# Altium PCB PCB1.PcbDoc (part 4 of 5)
Units mm, origin at the board's own origin, x right, y up, seen from the top; angles counter-clockwise.
Board outline 200 x 110 mm, 4 copper layers (Top Layer, Power Layer, GND Layer, Bottom Layer), stack 1.714 mm thick; 627 components, 400 nets, 2020 pads, 570 vias.
Unrouted connection lines stored in the file: 110.
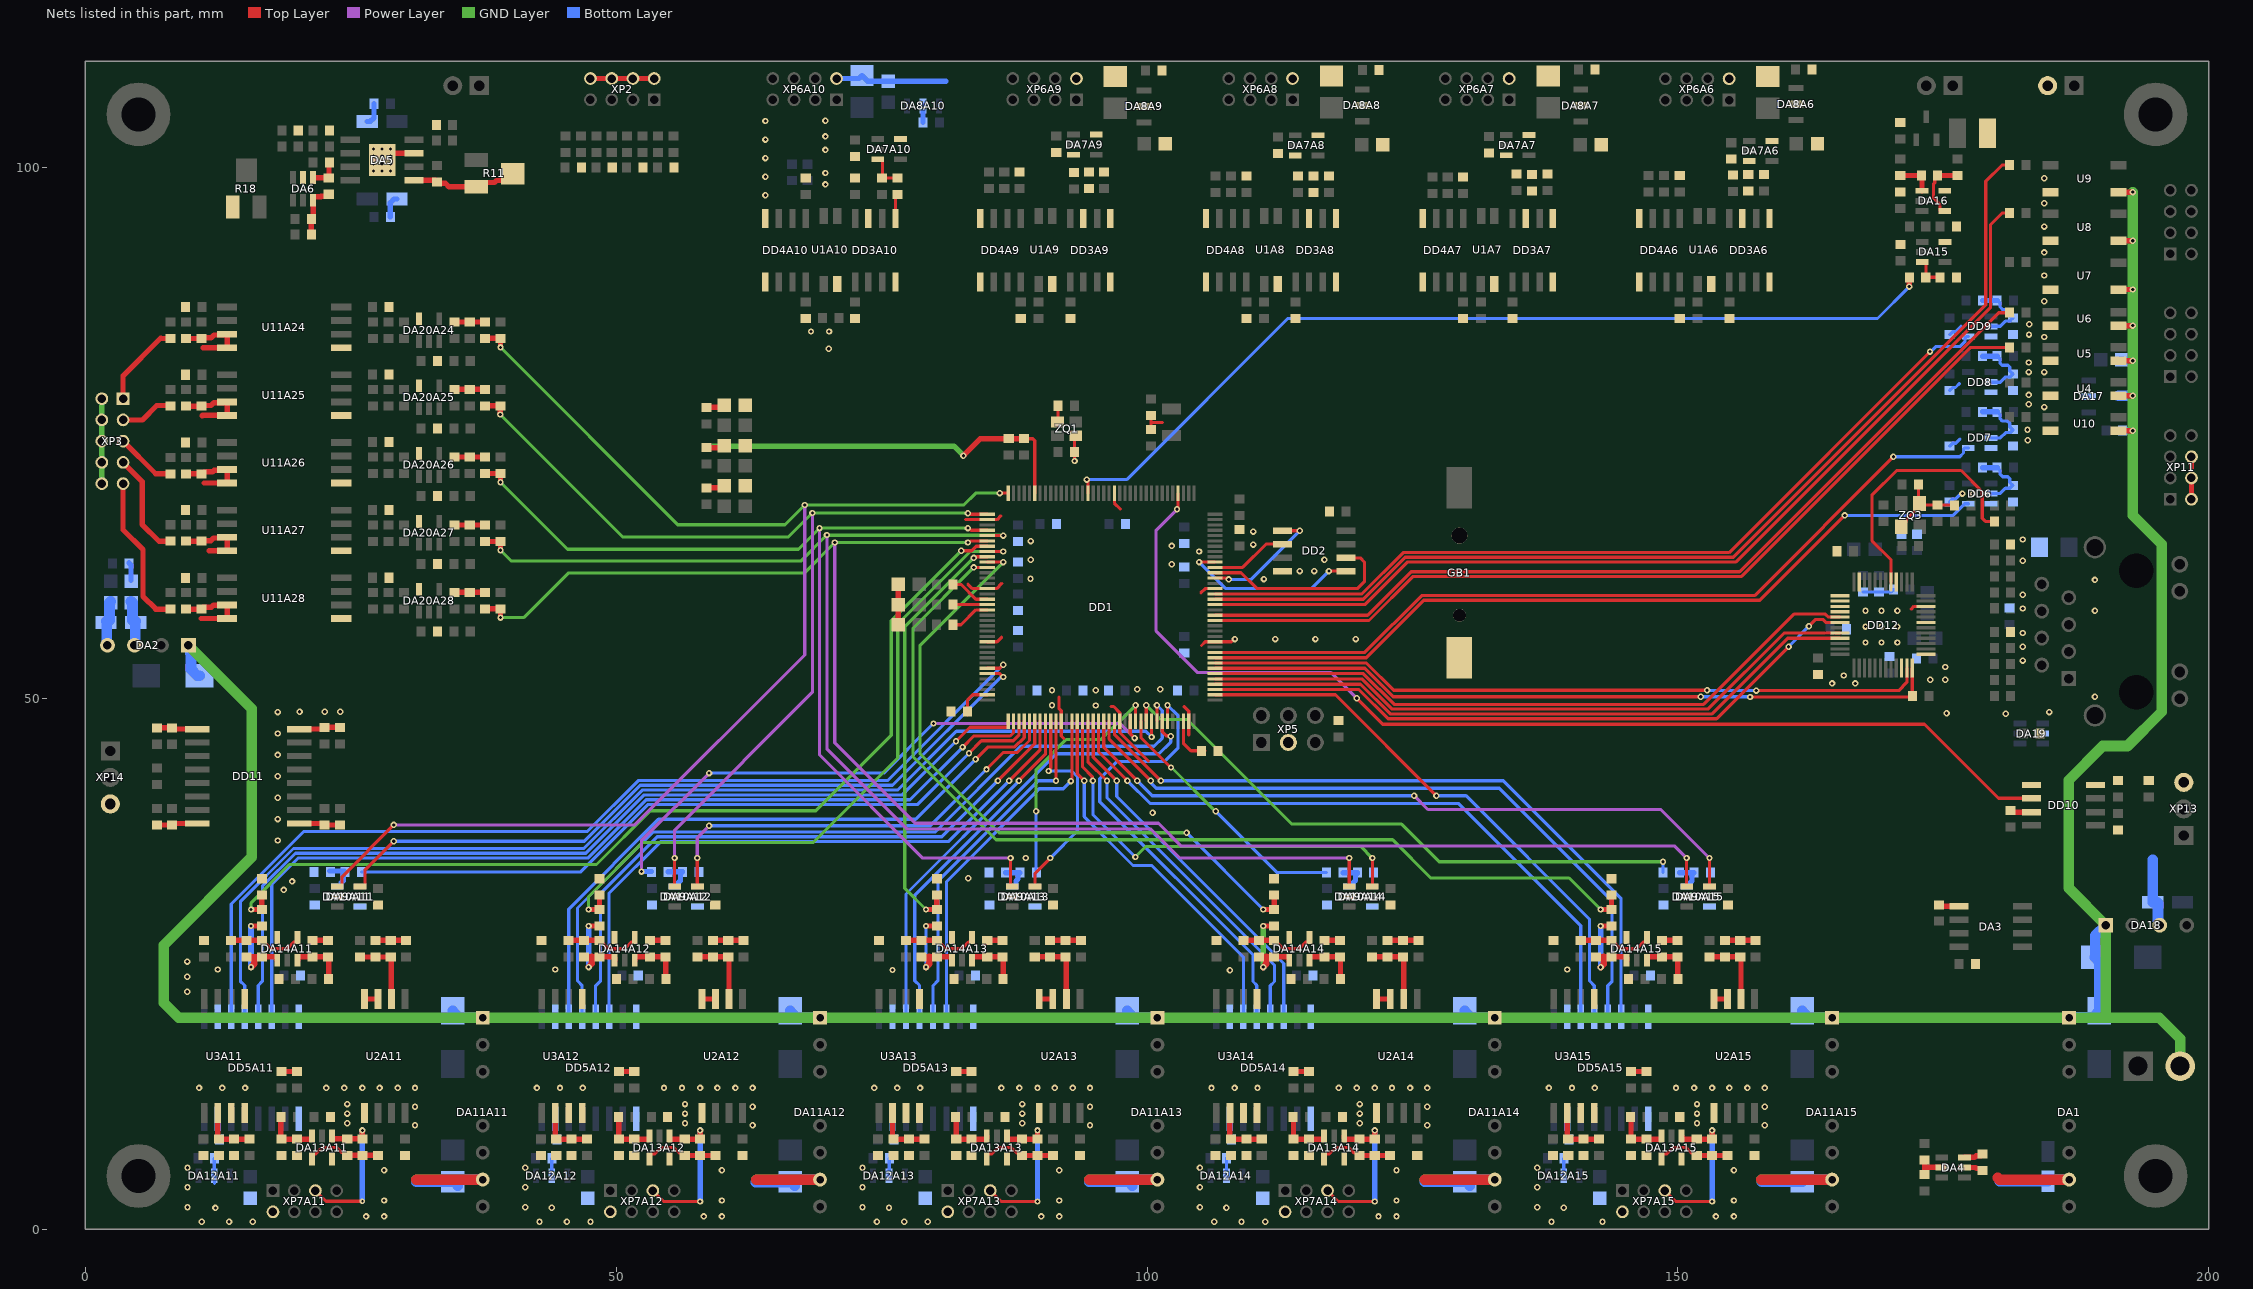
[diagram p5: the nets of this part, all layers, seen from the top]

## Via types
v1: diameter 0.6, hole 0.3, Top Layer to Bottom Layer, tented both sides, 557 vias
v2: diameter 0.6, hole 0.3, Top Layer to Bottom Layer, 12 vias
v3: diameter 0.5, hole 0.2, Top Layer to Bottom Layer, tented both sides, 1 vias

## Nets (pads, with @x,y where several pads share a name; then routed paths per layer and width w, separated by ;. In a path a pad name is that pad's centre, name@x,y a point inside that pad or via, vN(x,y) a via of type N, cw(c..) or ccw(c..) an arc to the next point about the centre after c; other vN are vias at no path point) (continued)
AGND: C5.2 C14.1 C17.1 C18.2 C21.2 C37.1 C38.2 C39.2 C40.2 C41.2 C42.2 C43.2 C44.2 C45A2.2 C45A3.2 C45A4.2 C45A5.2 C58A11.2 C58A12.2 C58A13.2 C58A14.2 C58A15.2 C60A11.2 C60A12.2 C60A13.2 C60A14.2 C60A15.2 C62A11.1 C62A12.1 C62A13.1 C62A14.1 C62A15.1 C67A11.2 C67A12.2 C67A13.2 C67A14.2 C67A15.2 C70A11.2 C70A12.2 C70A13.2 C70A14.2 C70A15.2 C73A11.2 C73A12.2 C73A13.2 C73A14.2 C73A15.2 C76A11.2 C76A12.2 C76A13.2 C76A14.2 C76A15.2 C123A24.2 C123A25.2 C123A26.2 C123A27.2 C123A28.2 C124A24.2 C124A25.2 C124A26.2 C124A27.2 C124A28.2 C125A24.2 C125A25.2 C125A26.2 C125A27.2 C125A28.2 C127A24.2 C127A25.2 C127A26.2 C127A27.2 C127A28.2 DA5.3 DA5.EPAD DA6.2 DA6.6 DA9A11.2 DA9A12.2 DA9A13.2 DA9A14.2 DA9A15.2 DA14A11.5 DA14A12.5 DA14A13.5 DA14A14.5 DA14A15.5 DA20A24.5 DA20A25.5 DA20A26.5 DA20A27.5 DA20A28.5 DD1.31 R1.2 R3.2 R4.2 R13.2 R15.2 R18.1 R28A11.2 R28A12.2 R28A13.2 R28A14.2 R28A15.2 R35A11.2 R35A12.2 R35A13.2 R35A14.2 R35A15.2 R84A24.2 R84A25.2 R84A26.2 R84A27.2 R84A28.2 U2A11.3 U2A11.4 U2A12.3 U2A12.4 U2A13.3 U2A13.4 U2A14.3 U2A14.4 U2A15.3 U2A15.4 U3A11.5 U3A12.5 U3A13.5 U3A14.5 U3A15.5 U11A24.5 U11A25.5 U11A26.5 U11A27.5 U11A28.5 XP2.2 XP2.4 XP2.6 XP2.8 | length 108.1
  Top Layer w0.3: C17.1@88.425,74.45 89.249,74.45 89.425,74.274 DD1.31@89.425,69.3
  Top Layer w0.5: C44.2@21.275,93.675 C43.2@21.275,95.125 21.275,95.175 21.45,95.35 DA6.6@21.45,96.9 21.45,97.225 21.475,97.25 22.175,97.25 22.225,97.3 22.75,97.3 C42.2@22.925,97.475 ; R35A11.2@21.39,27.2 C70A11.2@22.84,27.2 ; U2A11.4@26.29,21.675 U2A11.3@27.565,21.675 ; R28A11.2@27.315,27.2 C60A11.2@30.215,27.2 ; v2(28.75,101.05) 28.75,101.15 28.95,101.35 DA5.3@30.95,101.35 ; R84A28.2@34.75,59.975 C124A28.2@36.2,59.975 C127A28.2@37.65,59.975 ; R84A27.2@34.75,66.325 C124A27.2@36.2,66.325 C127A27.2@37.65,66.325 ; R84A26.2@34.75,72.725 C124A26.2@36.2,72.725 C127A26.2@37.65,72.725 ; R84A25.2@34.75,79.1 C124A25.2@36.2,79.1 C127A25.2@37.65,79.1 ; R84A24.2@34.75,85.45 C124A24.2@36.2,85.45 C127A24.2@37.65,85.45 ; XP2.8@47.575,108.375 XP2.6@49.575,108.375 XP2.4@51.575,108.375 XP2.2@53.575,108.375 ; R35A12.2@53.175,27.2 C70A12.2@54.625,27.2 ; U2A12.4@58.075,21.675 U2A12.3@59.35,21.675 ; C18.2@58.5,69.825 60,69.825 R3.2@60.175,70 ; C5.2@58.5,73.6 59.975,73.6 R1.2@60.175,73.8 ; C21.2@58.5,77.4 59.975,77.4 R4.2@60.175,77.6 ; R28A12.2@59.1,27.2 C60A12.2@62,27.2 ; v1(82.7,72.85) 84.3,74.45 C14.1@86.975,74.45 C17.1@88.425,74.45 ; R35A13.2@84.95,27.2 C70A13.2@86.4,27.2 ; U2A13.4@89.85,21.675 U2A13.3@91.125,21.675 ; R28A13.2@90.875,27.2 C60A13.2@93.775,27.2 ; R35A14.2@116.725,27.2 C70A14.2@118.175,27.2 ; U2A14.4@121.625,21.675 U2A14.3@122.9,21.675 ; R28A14.2@122.65,27.2 C60A14.2@125.55,27.2 ; R35A15.2@148.5,27.2 C70A15.2@149.95,27.2 ; U2A15.4@153.4,21.675 U2A15.3@154.675,21.675 ; R28A15.2@154.425,27.2 C60A15.2@157.325,27.2
  GND Layer w0.5: XP2.8@47.575,108.375 XP2.6@49.575,108.375 XP2.4@51.575,108.375 XP2.2@53.575,108.375 ; 59.115,73.75 81.8,73.75 v1(82.7,72.85)
  Bottom Layer w0.5: C37.1@26.55,104.325 26.825,104.325 27.175,104.675 C38.2@27.175,106 ; C39.2@28.725,95.35 28.725,96.675 29.075,97.025 C40.2@29.35,97.025
  other v2: 27.15,99.65 27.95,99.65 28.75,99.65 27.15,100.35 27.95,100.35 28.75,100.35 27.15,101.05 27.95,101.05 27.15,101.75 27.95,101.75 28.75,101.75
AGND_CS: C6.2 C121A24.2 C121A25.2 C121A26.2 C121A27.2 C121A28.2 C122A24.1 C122A25.1 C122A26.1 C122A27.1 C122A28.1 R2.2 R81A24.2 R81A25.2 R81A26.2 R81A27.2 R81A28.2 U11A24.3 U11A24.4 U11A25.3 U11A25.4 U11A26.3 U11A26.4 U11A27.3 U11A27.4 U11A28.3 U11A28.4 XP3.2 XP3.4 XP3.6 XP3.8 XP3.10 | length 47.2
  Top Layer w0.5: R81A28.2@9.475,58.394 C122A28.1@10.925,58.394 11.1,58.569 11.875,58.569 12.075,58.769 13.325,58.769 U11A28.3@13.35,58.794 U11A28.4@13.35,57.519 10.9,57.519 ; R81A27.2@9.475,64.794 C122A27.1@10.925,64.794 10.98,64.85 11.83,64.85 12.083,65.103 13.283,65.103 U11A27.3@13.35,65.169 U11A27.4@13.35,63.894 11.65,63.894 ; R81A25.2@9.475,77.519 C122A25.1@10.925,77.519 10.98,77.575 11.83,77.575 12.105,77.849 13.28,77.849 U11A25.3@13.35,77.919 U11A25.4@13.35,76.644 11.025,76.644 11,76.619 ; R81A24.2@9.475,83.894 C122A24.1@10.925,83.894 10.98,83.95 11.83,83.95 12.105,84.224 13.28,84.224 U11A24.3@13.35,84.294 U11A24.4@13.35,83.019 11.1,83.019 ; R81A26.2@9.492,71.137 10.992,71.137 10.992,71.161 11.15,71.319 11.44,71.319 11.443,71.322 11.972,71.322 12.124,71.474 13.28,71.474 U11A26.3@13.35,71.544 U11A26.4@13.35,70.269 11.2,70.269
  GND Layer w0.5: XP3.10@1.55,70.219 XP3.8@1.55,72.219 XP3.6@1.55,74.219 XP3.4@1.55,76.219 XP3.2@1.55,78.219
  Bottom Layer w0.5: C6.2@4.1,62.794 4.1,62.744 4.3,62.544 R2.2@4.3,61.119
CRASH_COL: DD1.128 R53.2 | length 98.6
  Top Layer w0.3: DD1.128@106.4,59.325 120.361,59.325 124.311,63.275 155.225,63.275 179,87.05 179,98.7 180.525,100.225 R53.2@181.25,100.225
CRASH_IND: DD1.125 R50.2 | length 86.7
  Top Layer w0.3: DD1.125@106.4,57.825 120.771,57.825 124.871,61.925 155.809,61.925 180.203,86.319 181.219,86.319 R50.2@181.25,86.35
CS1: R80A24.2 XP3.1 | length 8.1
  Top Layer w0.5: XP3.1@3.55,78.219 3.55,80.369 7.1,83.919 ; 7.1,83.894 R80A24.2@8.075,83.894
CS2: R80A25.2 XP3.3 | length 5
  Top Layer w0.5: XP3.3@3.55,76.219 5.375,76.219 6.725,77.569 R80A25.2@8.025,77.569
CS3: R80A26.2 XP3.5 | length 5.7
  Top Layer w0.5: XP3.5@3.55,74.219 6.625,71.144 R80A26.2@8.025,71.144
CS4: R80A27.2 XP3.7 | length 9.8
  Top Layer w0.5: XP3.7@3.55,72.219 5.35,70.419 5.35,66.369 6.925,64.794 R80A27.2@7.95,64.794
CS5: R80A28.2 XP3.9 | length 14.3
  Top Layer w0.5: XP3.9@3.55,70.219 3.55,65.869 5.425,63.994 5.425,59.605 6.636,58.394 R80A28.2@7.85,58.394
DRV1_ADC: C76A11.1 DD1.43 R40A11.2 | length 92.6
  Top Layer w0.3: v1(82.5,63.9) 83.469,63.9 83.894,64.325 DD1.43@84.95,64.325
  Top Layer w0.5: v1(15.605,30.1) R40A11.2@16.625,30.1 C76A11.1@16.625,31.45
  GND Layer w0.3: v1(15.605,30.1) 15.605,30.73 19.219,34.344 48.144,34.344 53.2,39.4 68.8,39.4 75.9,46.5 75.9,57.3 v1(82.5,63.9)
DRV1_AN_MOD: DD1.75 R25A11.1 | length 68.6
  Top Layer w0.3: v1(83.225,44.825) 84.4,46 87.4,46 87.925,46.525 DD1.75@87.925,47.85
  Bottom Layer w0.3: R25A11.1@26,33.65 46.657,33.65 53.007,40 78.4,40 v1(83.225,44.825)
DRV1_DIG_MOD: DD1.100 DD5A11.4 | length 105.2
  Top Layer w0.3: v1(100.425,46.35) DD1.100@100.425,47.85
  Bottom Layer w0.3: DD5A11.4@15.005,20 15.005,22.945 14.6,23.35 14.6,30.848 19.602,35.85 46.948,35.85 52.448,41.35 76.492,41.35 82.043,46.902 99.873,46.902 v1(100.425,46.35)
DRV1_ERR1: DD1.73 DD5A11.5 | length 89.5
  Top Layer w0.3: v1(82,45.95) 83.325,47.275 86.925,47.275 DD1.73@86.925,47.85
  Bottom Layer w0.3: DD5A11.5@16.275,20 16.275,22.95 16.675,23.35 16.675,32.286 19.789,35.4 47.134,35.4 52.634,40.9 76.95,40.9 v1(82,45.95)
DRV1_ERR2: DD1.74 DD5A11.6 | length 89.4
  Top Layer w0.3: v1(82.625,45.4) 83.675,46.45 87.1,46.45 87.425,46.775 DD1.74@87.425,47.85
  Bottom Layer w0.3: DD5A11.6@17.545,20 17.545,32.47 20.025,34.95 47.321,34.95 52.821,40.45 77.675,40.45 v1(82.625,45.4)
DRV1_ON: DD1.66 DD5A11.3 | length 94.3
  Top Layer w0.3: DD1.66@84.95,52.825 86.125,52.825 v1(86.45,53.15)
  Bottom Layer w0.3: DD5A11.3@13.735,20 13.735,30.619 20.566,37.45 47.275,37.45 52.075,42.25 75.55,42.25 v1(86.45,53.15)
DRV1_SEL_AN: DA9A11.6 DD1.67 | length 71.2
  Top Layer w0.3: DA9A11.6@25.875,32.275 26.2,32.275 26.325,32.4 26.325,33.8 v1(29.05,36.525) ; DD1.67@84.95,52.325 86.125,52.325 v1(86.45,52)
  Bottom Layer w0.3: v1(29.05,36.525) 46.986,36.525 52.261,41.8 76.025,41.8 86.168,51.943 86.393,51.943 v1(86.45,52)
DRV2_ADC: C76A12.1 DD1.44 R40A12.2 | length 65
  Top Layer w0.3: DD1.44@84.95,63.825 v1(86.45,63.825)
  Top Layer w0.5: v1(47.4,30.1) R40A12.2@48.425,30.1 C76A12.1@48.425,31.45
  GND Layer w0.3: v1(47.4,30.1) 47.4,31.325 52.5,36.425 68.577,36.425 76.525,44.373 76.525,57 83.35,63.825 v1(86.45,63.825)
DRV2_AN_MOD: DD1.96 R25A12.1 | length 57.2
  Top Layer w0.3: DD1.96@98.425,47.85 98.425,46.675 98.825,46.275 v1(98.825,46.25)
  Power Layer w0.3: v1(52.375,33.675) 52.375,36.575 v1(58.75,42.95) ; v1(79.881,47.63) 97.445,47.63 v1(98.825,46.25)
  Bottom Layer w0.3: R25A12.1@53.3,33.675 R25A12.1@53.325,33.65 ; v1(58.75,42.95) 75.202,42.95 v1(79.881,47.63)
  Bottom Layer w0.5: v1(52.375,33.675) R25A12.1@53.3,33.675
DRV2_DIG_MOD: DD1.101 DD5A12.4 | length 76.9
  Top Layer w0.3: DD1.101@100.925,47.85 100.925,48.6 v1(100.925,49.35)
  Bottom Layer w0.3: DD5A12.4@46.79,20 46.79,22.935 46.35,23.375 46.35,30.25 53.5,37.4 80.043,37.4 88.118,45.475 100.65,45.475 101.425,46.25 101.425,48.85 v1(100.925,49.35)
DRV2_ERR1: DD1.78 DD5A12.5 | length 60.7
  Top Layer w0.3: v1(85.95,42.225) 89.425,45.7 DD1.78@89.425,47.85
  Bottom Layer w0.3: DD5A12.5@48.06,20 48.06,22.935 48.525,23.4 48.525,31.625 53.85,36.95 80.675,36.95 v1(85.95,42.225)
DRV2_ERR2: DD1.79 DD5A12.6 | length 60.5
  Top Layer w0.3: v1(87.006,42.225) 89.925,45.144 DD1.79@89.925,47.85
  Bottom Layer w0.3: DD5A12.6@49.33,20 49.33,31.655 54.175,36.5 81.281,36.5 v1(87.006,42.225)
DRV2_ON: DD1.76 DD5A12.3 | length 61.3
  Top Layer w0.3: v1(83.85,44.25) 85.025,45.425 87.554,45.425 88.425,46.296 DD1.76@88.425,47.85
  Bottom Layer w0.3: DD5A12.3@45.52,20 45.52,30.145 53.975,38.6 78.2,38.6 v1(83.85,44.25)
DRV2_SEL_AN: DA9A12.6 DD1.77 | length 41.5
  Top Layer w0.3: v1(57.625,34.95) 57.625,32.3 DA9A12.6@57.65,32.275 ; v1(84.875,43.3) 86.475,44.9 87.8,44.9 88.925,46.025 DD1.77@88.925,47.85
  Power Layer w0.3: v1(57.625,34.95) 57.625,36.875 v1(58.75,38)
  Bottom Layer w0.3: v1(58.75,38) 79.575,38 v1(84.875,43.3)
DRV3_ADC: C76A13.1 DD1.45 R40A13.2 | length 40.3
  Top Layer w0.3: v1(83.675,63.225) 83.756,63.225 83.856,63.325 DD1.45@84.95,63.325
  Top Layer w0.5: v1(79.175,30.1) R40A13.2@80.2,30.1 C76A13.1@80.2,31.45
  GND Layer w0.3: v1(79.175,30.1) 77.175,32.1 77.175,56.725 v1(83.675,63.225)
DRV3_AN_MOD: DD1.97 R25A13.1 | length 23.1
  Top Layer w0.3: DD1.97@98.925,47.85 v1(98.925,49.35)
  GND Layer w0.3: v1(89.55,39.35) 89.55,43.275 92.4,46.125 95.7,46.125 v1(98.925,49.35)
  Bottom Layer w0.3: v1(89.55,39.35) 89.55,33.6 R25A13.1@89.575,33.575
DRV3_DIG_MOD: DD1.102 DD5A13.4 | length 44.2
  Top Layer w0.3: DD1.102@101.425,47.85 101.425,46.865 101.814,46.475 102.175,46.475 v1(102.225,46.425)
  Bottom Layer w0.3: DD5A13.4@78.565,20 78.565,22.96 78.125,23.4 78.125,31.451 91.449,44.775 101.125,44.775 102.225,45.875 v1(102.225,46.425)
DRV3_ERR1: DD1.82 DD5A13.5 | length 33.6
  Top Layer w0.3: v1(91.425,42.225) DD1.82@91.425,47.85
  Bottom Layer w0.3: DD5A13.5@79.835,20 79.835,22.935 80.3,23.4 80.3,32.775 89.75,42.225 v1(91.425,42.225)
DRV3_ERR2: DD1.85 DD5A13.6 | length 34.1
  Top Layer w0.3: v1(92.825,42.2) 92.825,42.281 92.925,42.381 DD1.85@92.925,47.85
  Bottom Layer w0.3: DD5A13.6@81.105,20 81.105,32.73 89.85,41.475 92.1,41.475 v1(92.825,42.2)
DRV3_ON: DD1.80 DD5A13.3 | length 33.3
  Top Layer w0.3: v1(87.925,42.225) 90.425,44.725 DD1.80@90.425,47.85
  Bottom Layer w0.3: DD5A13.3@77.295,20 77.295,31.56 87.925,42.19 v1(87.925,42.225)
DRV3_SEL_AN: DA9A13.6 DD1.81 | length 19.7
  Top Layer w0.3: DA9A13.6@89.45,32.275 89.45,33.525 v1(90.875,34.95) ; v1(90.725,43.15) 90.725,43.231 90.925,43.431 DD1.81@90.925,47.85
  Bottom Layer w0.3: v1(90.725,43.15) 92.9,43.15 93.45,42.6 93.45,37.525 v1(90.875,34.95)
DRV4_ADC: C76A14.1 DD1.46 R40A14.2 | length 63.6
  Top Layer w0.3: DD1.46@84.95,62.825 v1(86.45,62.825)
  Top Layer w0.5: v1(110.95,30.1) R40A14.2@111.975,30.1 C76A14.1@111.975,31.45
  GND Layer w0.3: v1(86.45,62.825) 78.625,55 78.625,44.75 86.05,37.325 v1(103.725,37.325)
  Bottom Layer w0.3: v1(103.725,37.325) v1(110.95,30.1)
DRV4_AN_MOD: DD1.98 R25A14.1 | length 24.3
  Top Layer w0.3: DD1.98@99.425,47.85 99.425,46.275 102.225,43.475 v1(102.25,43.475)
  GND Layer w0.3: v1(102.25,43.475) 102.3,43.475 106.425,39.35 v1(106.475,39.35)
  Bottom Layer w0.3: v1(106.475,39.35) 112.25,33.575 R25A14.1@116.9,33.575
DRV4_DIG_MOD: DD1.103 DD5A14.4 | length 43.1
  Top Layer w0.3: DD1.103@101.925,47.85 101.925,48.6 v1(101.925,49.35)
  Bottom Layer w0.3: v1(101.925,49.35) 102.925,48.35 102.925,45.325 101.65,44.05 97.175,44.05 95.55,42.425 95.55,40.25 109.975,25.825 109.975,23.325 110.34,22.96 DD5A14.4@110.34,20
DRV4_ERR1: DD1.88 DD5A14.5 | length 35.3
  Top Layer w0.3: DD1.88@94.425,47.85 94.425,44.025 v1(96.225,42.225)
  Bottom Layer w0.3: v1(96.225,42.225) 96.225,40.625 112,24.85 112,23.325 111.61,22.935 DD5A14.5@111.61,20
DRV4_ERR2: DD1.89 DD5A14.6 | length 35.3
  Top Layer w0.3: DD1.89@94.925,47.85 94.925,44.45 v1(97.15,42.225)
  Bottom Layer w0.3: v1(97.15,42.225) 97.15,40.75 112.88,25.02 DD5A14.6@112.88,20
DRV4_ON: DD1.86 DD5A14.3 | length 35.4
  Top Layer w0.3: DD1.86@93.425,47.85 93.425,42.875 v1(94.075,42.225)
  Bottom Layer w0.3: v1(94.075,42.225) 94.075,38.85 98.675,34.25 100.45,34.25 109.07,25.63 DD5A14.3@109.07,20
DRV4_SEL_AN: DA9A14.6 DD1.87 | length 40.7
  Top Layer w0.3: DD1.87@93.925,47.85 93.925,43.525 94.843,42.607 94.843,42.282 v1(94.9,42.225) ; DA9A14.6@121.2,32.275 121.225,32.3 v1(121.225,34.95)
  GND Layer w0.3: v1(98.9,35.05) 99.9,36.05 120.125,36.05 v1(121.225,34.95)
  Bottom Layer w0.3: v1(94.9,42.225) 94.9,39.05 v1(98.9,35.05)
DRV5_ADC: C76A15.1 DD1.47 R40A15.2 | length 94.6
  Top Layer w0.3: v1(83.675,62.325) 84.375,62.325 DD1.47@84.95,62.325
  Top Layer w0.5: v1(142.725,30.1) R40A15.2@143.75,30.1 C76A15.1@143.75,31.45
  GND Layer w0.3: v1(83.675,62.325) 77.95,56.6 77.95,44.5 85.775,36.675 123.125,36.675 126.725,33.075 139.75,33.075 v1(142.725,30.1)
DRV5_AN_MOD: DD1.99 R25A15.1 | length 57.3
  Top Layer w0.3: DD1.99@99.925,47.85 v1(99.925,49.35)
  GND Layer w0.3: v1(99.925,49.35) 101.275,48 103.8,48 113.65,38.15 123.975,38.15 127.525,34.6 v1(148.6,34.6)
  Bottom Layer w0.3: R25A15.1@148.6,33.575 v1(148.6,34.6)
DRV5_DIG_MOD: DD1.110 DD5A15.4 | length 53.4
  Top Layer w0.3: DD1.110@106.4,50.325 117.75,50.325 v1(127.25,40.825)
  Bottom Layer w0.3: v1(127.25,40.825) 130.05,40.825 141.675,29.2 141.675,23.375 142.115,22.935 DD5A15.4@142.115,20
DRV5_ERR1: DD1.92 DD5A15.5 | length 66.4
  Top Layer w0.3: DD1.92@96.425,47.85 96.425,46.15 v1(100.35,42.225)
  Bottom Layer w0.3: v1@100.35,42.026 100.851,41.525 133.175,41.525 143.8,30.9 143.8,23.35 143.385,22.935 DD5A15.5@143.385,20
DRV5_ERR2: DD1.93 DD5A15.6 | length 66.5
  Top Layer w0.3: DD1.93@96.925,47.85 96.925,46.6 v1(101.3,42.225)
  Bottom Layer w0.3: v1(101.3,42.225) 133.55,42.225 144.655,31.12 DD5A15.6@144.655,20
DRV5_ON: DD1.90 DD5A15.3 | length 63.5
  Top Layer w0.3: DD1.90@95.425,47.85 95.425,44.975 v1@98.065,42.335
  Bottom Layer w0.3: v1(98.15,42.225) 100.275,40.1 129.325,40.1 140.845,28.58 DD5A15.3@140.845,20
DRV5_SEL_AN: DA9A15.6 DD1.91 | length 66.5
  Top Layer w0.3: DD1.91@95.925,47.85 95.925,45.375 v1(99.075,42.225) ; DA9A15.6@152.975,32.275 v1(152.975,34.95)
  Power Layer w0.3: v1(125.15,40.825) 126.45,39.525 148.4,39.525 v1(152.975,34.95)
  Bottom Layer w0.3: v1(99.075,42.225) 100.475,40.825 v1(125.15,40.825)
EMER_BUT: DD1.117 DD6.4 | length 77
  Top Layer w0.3: DD1.117@106.4,53.825 120.65,53.825 126.05,59.225 157.725,59.225 v1(165.725,67.225)
  Bottom Layer w0.3: v1(165.725,67.225) 175.925,67.225 177.025,68.325 DD6.4@177.35,68.325
EMIS_COL: DD1.127 R52.2 | length 94.7
  Top Layer w0.3: DD1.127@106.4,58.825 120.498,58.825 124.498,62.825 155.436,62.825 179.45,86.839 179.45,94.625 180.525,95.7 R52.2@181.25,95.7
EMIS_IND: DD1.124 R49.2 | length 85.5
  Top Layer w0.3: DD1.124@106.4,57.325 120.907,57.325 125.057,61.475 156,61.475 177.575,83.05 R49.2@181.25,83.05
ETH_CS: DD1.114 DD12.29 | length 63.7
  Top Layer w0.3: DD1.114@106.4,52.325 120.375,52.325 123.275,49.425 152.425,49.425 160.925,57.925 163.875,57.925 164.15,57.65 DD12.29@165.275,57.65
ETH_INT: DD1.116 DD12.47 | length 67.9
  Top Layer w0.3: DD1.116@106.4,53.325 120.65,53.325 123.225,50.75 v1(152.75,50.75) ; v1(157.375,50.725) 170.799,50.725 171.575,51.5 DD12.47@171.575,52.85
  Bottom Layer w0.3: v1(152.75,50.75) 152.763,50.738 157.362,50.738 v1(157.375,50.725)
ETH_MISO: DD1.112 DD12.33 | length 63
  Top Layer w0.3: DD1.112@106.4,51.325 120.1,51.325 122.9,48.525 153.225,48.525 160.35,55.65 DD12.33@165.275,55.65
ETH_MOSI: DD1.113 DD12.32 | length 63
  Top Layer w0.3: DD1.113@106.4,51.825 120.236,51.825 123.086,48.975 152.825,48.975 160.001,56.15 DD12.32@165.275,56.15
ETH_RST: DD1.115 DD12.48 R79.1 | length 69.5
  Top Layer w0.3: DD1.115@106.4,52.825 120.514,52.825 123.189,50.15 v1(152.15,50.15) ; v1(156.8,50.125) 172.024,50.125 R79.1@172.1,50.2 172.075,50.226 DD12.48@172.075,52.85
  Bottom Layer w0.3: v1(152.15,50.15) 152.162,50.137 156.787,50.137 v1(156.8,50.125)
ETH_SCLK: DD1.111 DD12.30 | length 64
  Top Layer w0.3: DD1.111@106.4,50.825 119.95,50.825 122.7,48.075 153.65,48.075 v1(160.425,54.85) ; v1(162.339,56.789) 162.975,57.425 163.65,57.425 163.925,57.15 DD12.30@165.275,57.15
  Bottom Layer w0.3: v1(160.425,54.85) 160.425,54.875 v1(162.339,56.789)
EXT1_AN_MOD: C127A24.1 DA9A11.1 DD1.36 R86A24.2 | length 125.9
  Top Layer w0.3: DA9A11.1@23.725,32.275 24.05,32.275 24.175,32.4 24.175,33.2 v1(29.05,38.075) ; v1(86.125,69.325) 86.925,69.325 DD1.36@86.925,69.3
  Top Layer w0.5: C127A24.1@37.65,83.9 R86A24.2@39.1,83.9 v1(39.1,83.05)
  Power Layer w0.3: v1(29.05,38.075) 51.75,38.075 67.75,54.075 v1(67.75,68.2)
  GND Layer w0.3: v1(39.1,83.05) 55.8,66.35 65.9,66.35 v1(67.75,68.2) 82.725,68.2 83.85,69.325 v1(86.125,69.325)
EXT2_AN_MOD: C127A25.1 DA9A12.1 DD1.37 R86A25.2 | length 94.5
  Top Layer w0.3: DA9A12.1@55.5,32.275 v1(55.5,34.95) ; v1(83.125,67.425) 83.206,67.425 83.306,67.325 DD1.37@84.95,67.325
  Top Layer w0.5: C127A25.1@37.65,77.55 R86A25.2@39.1,77.55 39.088,77.538 39.088,76.738 v1(39.075,76.725)
  Power Layer w0.3: v1(55.5,34.95) 55.5,37.575 68.475,50.55 v1(68.475,67.45)
  GND Layer w0.3: v1(39.075,76.725) 50.614,65.186 66.211,65.186 v1(68.475,67.45) 68.487,67.438 83.113,67.438 v1(83.125,67.425)
EXT3_AN_MOD: C127A26.1 DA9A13.1 DD1.40 R86A26.2 | length 97.8
  Top Layer w0.3: v1(83.125,66.025) 83.206,66.025 83.406,65.825 DD1.40@84.95,65.825 ; v1(87.15,34.95) 87.15,32.4 87.275,32.275 DA9A13.1@87.3,32.275
  Top Layer w0.5: C127A26.1@37.65,71.175 R86A26.2@39.1,71.175 v1(39.1,70.35)
  Power Layer w0.3: v1(69.15,66.025) 69.15,44.675 78.875,34.95 v1(87.15,34.95)
  GND Layer w0.3: v1(39.1,70.35) 45.408,64.042 67.167,64.042 v1(69.15,66.025) v1(83.125,66.025)
EXT4_AN_MOD: C127A27.1 DA9A14.1 DD1.41 R86A27.2 | length 128.9
  Top Layer w0.3: DD1.41@84.95,65.325 v1(86.45,65.325) ; DA9A14.1@119.05,32.275 v1(119.05,34.95)
  Top Layer w0.5: C127A27.1@37.65,64.775 R86A27.2@39.1,64.775 v1(39.1,63.95)
  Power Layer w0.3: v1(69.843,65.382) 69.843,45.232 77.4,37.675 100.375,37.675 103.1,34.95 v1(119.05,34.95)
  GND Layer w0.3: v1(39.1,63.95) 40.132,62.918 67.378,62.918 v1(69.843,65.382) 69.875,65.35 86.425,65.35 v1(86.45,65.325)
EXT5_AN_MOD: C127A28.1 DA9A15.1 DD1.42 R86A28.2 | length 157.4
  Top Layer w0.3: v1(83.125,64.675) 83.206,64.675 83.356,64.825 DD1.42@84.95,64.825 ; DA9A15.1@150.825,32.275 v1(150.825,34.95)
  Top Layer w0.5: C127A28.1@37.65,58.425 R86A28.2@39.1,58.425 v1(39.1,57.6)
  Power Layer w0.3: v1(70.575,64.675) 70.575,45.8 78.15,38.225 101.075,38.225 103.225,36.075 149.7,36.075 v1(150.825,34.95)
  GND Layer w0.3: v1(39.1,57.6) 41.275,57.6 45.469,61.794 67.694,61.794 v1(70.575,64.675) v1(83.125,64.675)
FIBER_IL: DD1.129 DD9.4 | length 81.2
  Top Layer w0.3: DD1.129@106.4,59.825 120.225,59.825 124.125,63.725 154.826,63.725 v1(173.751,82.649)
  Bottom Layer w0.3: v1(173.751,82.649) 173.799,82.649 174.275,83.125 176.55,83.125 177.05,83.625 177.05,83.95 177.175,84.075 DD9.4@177.35,84.075
FLOW: DD1.4 DD10.6 | length 102.8
  Top Layer w0.3: v1(102.825,67.8) 102.825,67.881 102.925,67.981 DD1.4@102.925,69.3 ; v1(119.75,50) 122.2,47.55 173.225,47.55 180.2,40.575 DD10.6@183.325,40.575
  Power Layer w0.3: v1(102.825,67.8) 100.85,65.825 100.85,56.325 104.762,52.413 117.337,52.413 v1(119.75,50)
GND: C3.2 C7.1 C8.2 C10.2 C11.2 C12.2 C13.2 C15.2 C16.1 C19.2 C20.2 C22.2 C23.1 C24.2 C25.2 C26.2 C27.2 C28.1 C29.1 C30.1 C31.2 C32.2 C33.1 C34.2 C35.2 C46A6.2 C46A7.2 C46A8.2 C46A9.2 C46A10.2 C47A6.2 C47A7.2 C47A8.2 C47A9.2 C47A10.2 C55A11.2 C55A12.2 C55A13.2 C55A14.2 C55A15.2 C56A11.2 C56A12.2 C56A13.2 C56A14.2 C56A15.2 C64A11.2 C64A12.2 C64A13.2 C64A14.2 C64A15.2 C77.2 C78.2 C79.2 C83.2 C84.2 C85.2 C86.2 C87.2 C88.2 C89.2 C90.2 C95.2 C96.2 C97.2 C98.2 C99.1 C104.2 C105.2 C106.2 C107.2 C108.2 C109.2 C110.2 C111.2 C112.2 C113.2 C114.2 C115.2 C116.2 C117.2 C118.2 C119.2 C120.2 DA1.7 DA3.1 DA4.2 DA10A11.5 DA10A12.5 DA10A13.5 DA10A14.5 DA10A15.5 DA15.5 DA16.5 DA19.2 DD1.16 DD1.38 DD1.51 DD1.61 DD1.83 DD1.94 DD1.107 DD1.120 DD1.130 DD2.4 DD3A6.4 DD3A7.4 DD3A8.4 DD3A9.4 DD3A10.4 DD4A6.5 DD4A7.5 DD4A8.5 DD4A9.5 DD4A10.5 DD5A11.2 DD5A11.8 DD5A12.2 DD5A12.8 DD5A13.2 DD5A13.8 DD5A14.2 DD5A14.8 DD5A15.2 DD5A15.8 DD6.3 DD7.3 DD8.3 DD9.3 DD10.5 DD10.7 DD11.1 DD11.8 DD12.1 DD12.7 DD12.10 DD12.16 DD12.23 DD12.25 DD12.26 DD12.27 DD12.28 DD12.46 GB1.1 R1.1 R3.1 R4.1 R5.2 R9.2 R43.2 R46.1 R47.1 R75.1 U1A6.2 U1A7.2 U1A8.2 U1A9.2 U1A10.2 U4.2 U5.2 U6.2 U7.3 U8.3 U9.3 U10.2 VD1.2 VD2.2 VD3.2 XP5.3 XP11.2 XP11.4 XP11.6 XP12.2 ZQ1.2 ZQ1.4 ZQ3.2 ZQ3.4 | length 88.7
  Top Layer w0.3: 82.925,66.825 DD1.38@84.95,66.825 85.875,66.825 86.225,67.175 ; 83.125,60.75 83.55,60.325 DD1.51@84.95,60.325 85.825,60.325 86.325,60.825 ; DD1.61@84.95,55.325 85.875,55.325 86.3,55.75 ; ZQ1.4@91.575,76.025 91.625,76.075 C19.2@91.625,77.55 ; 91.7,50.1 91.7,49.051 91.925,48.826 DD1.83@91.925,47.85 91.925,46.45 92.175,46.2 ; v1(93.175,72.35) C12.2@93.175,73.2 93.175,74.625 ZQ1.2@93.275,74.725 ; 96.6,49.225 96.849,49.225 97.425,48.649 DD1.94@97.425,47.85 97.425,46.775 100.112,44.087 ; DD1.16@96.925,69.3 96.925,68.384 97.477,67.832 ; C20.2@100.375,75.325 100.375,75.988 ; C13.2@100.375,76.65 100.375,75.988 ; 101.426,75.988 100.375,75.988 ; 103.5,49.2 103.925,48.775 DD1.107@103.925,47.85 103.925,46.55 ; 105.075,59.925 105.475,60.325 DD1.130@106.4,60.325 ; 105.125,54.975 105.475,55.325 107.949,55.325 108.199,55.575 v1(108.275,55.575) ; ZQ3.4@171.05,66.15 171.5,66.6 171.5,66.825 172.3,67.625 172.3,67.9 172.6,68.2 176.012,68.2 R75.1@176.05,68.162 ; 171.975,58.4 172.226,58.65 DD12.10@173.375,58.65 ; C112.2@172.675,70.15 172.675,68.425 ZQ3.2@172.75,68.35 ; C11.2@174.6,30.575 C11.2@174.775,30.4
  Top Layer w0.5: DD11.1@20.15,38.209 22.385,38.209 C99.1@22.525,38.069 C96.2@23.975,38.069 ; DD11.8@20.15,47.099 22.355,47.099 22.525,47.269 C97.2@23.975,47.269 ; VD3.2@76.55,56.925 VD2.2@76.55,58.825 VD1.2@76.55,60.725 ; C8.2@173.225,5.075 173.225,5.825 ; C15.2@173.225,6.425 173.225,5.825 ; C11.2@174.775,30.4 DA3.1@176.475,30.4 ; DA4.2@174.825,5.825 174.304,5.825 173.225,5.825 ; C95.2@181.325,39.425 181.475,39.275 DD10.7@183.325,39.275 ; XP11.2@198.375,68.75 XP11.4@198.375,70.75 XP11.6@198.375,72.75
  Top Layer w1: 180.125,4.825 180.285,4.665 DA1.7@186.85,4.665
  Bottom Layer w0.3: C120.2@167.425,60.01 C119.2@168.925,60.01 170.085,60.01 C109.2@170.325,60.25 ; C86.2@175.6,68.5 175.875,68.775 176.18,68.775 v1@176.604,69.199 ; C87.2@175.6,73.75 175.875,74.025 176.171,74.025 176.562,74.415 ; C88.2@175.6,79 175.875,79.275 176.15,79.275 176.535,79.66 ; C90.2@175.6,84.25 175.875,84.525 176.15,84.525 176.676,85.051
  Bottom Layer w0.5: C3.2@184.85,4.45 C3.2@185.065,4.665
  Bottom Layer w1: 180.325,4.5 C3.2@184.85,4.5 ; C3.2@185.065,4.665 DA1.7@186.85,4.665
  other v1: 9.6,22.35 9.6,23.775 107.8,24.375 76.025,24.4 12.475,24.45 44.25,24.45 139.575,24.45 9.6,25.2 18.675,31.95 19.475,32.75 83.15,33.05 88.575,34.95 18.125,36.6 18.125,38.617 100.525,39.225 18.125,40.633 18.125,42.65 18.125,44.667 18.125,46.683 180.875,48.551 175.307,48.583 18.125,48.7 184.975,48.7 20.175,48.725 22.55,48.725 24,48.725 95.175,49.325 91.05,49.35 189.275,50.151 91.05,50.75 95.175,50.75 99.075,50.85 101.25,50.85 164.525,51.4 166.7,51.4 173.775,51.751 175.175,51.751 165.625,52.15 175.175,52.951 182.475,53.551 182.475,54.851 167.675,55.25 169.175,55.25 170.675,55.25 112.067,55.575 115.858,55.575 119.65,55.575 182.475,56.151 167.675,56.75 169.175,56.75 170.675,56.75 167.675,58.25 169.175,58.25 170.675,58.25 189.275,58.251 182.475,58.451 182.475,59.751 189.275,61.151 111,61.225 89.025,61.25 114.375,61.975 115.75,61.975 102.325,62.625 182.475,62.951 89.05,63.05 116.7,63.05 104.9,63.825 102.325,64.35 110,64.475 89.05,64.8 182.475,64.951 110,65.7 176.8,69.275 177.8,69.275 182.95,74.3 182.925,75.3 184.5,77.425 183.05,77.7 183.05,78.575 183.05,80.725 184.5,80.725 183.05,81.625 70.025,82.925 184.5,84.025 183.075,84.25 68.35,84.55 70.05,84.55 183.1,85.225 184.5,87.4 184.5,89.825 184.5,92 184.5,94.425 184.5,96.625 184.5,98.975
GND_24V: C1.2 C2.2 C57A11.2 C57A12.2 C57A13.2 C57A14.2 C57A15.2 C81.1 C82.2 C91.2 DA1.1 DA2.1 DA11A11.1 DA11A12.1 DA11A13.1 DA11A14.1 DA11A15.1 DA17.2 DA18.1 U4.3 U5.3 U6.3 U7.4 U8.4 U9.4 U10.3 XP4.2 | length 363.3
  Top Layer w0.5: U10.3@191.5,75.2 v1(192.85,75.2) ; U4.3@191.5,78.5 v1(192.85,78.5) ; U5.3@191.5,81.8 v1(192.85,81.8) ; U6.3@191.5,85.1 v1(192.85,85.1) ; U7.4@191.5,88.5 v1(192.85,88.5) ; U8.4@191.5,93.1 v1(192.85,93.1) ; U9.4@191.5,97.675 v1(192.85,97.675)
  GND Layer w1: DA2.1@9.7,54.994 15.675,49.019 15.675,35.05 7.375,26.75 7.375,21.325 8.795,19.905 DA11A11.1@37.425,19.905 DA11A12.1@69.2,19.905 DA11A13.1@100.975,19.905 DA11A14.1@132.75,19.905 DA11A15.1@164.525,19.905 DA1.1@186.85,19.905 190.225,19.905 195.345,19.905 197.31,17.94 XP4.2@197.31,15.35 ; 190.305,19.985 DA18.1@190.305,28.625 186.8,32.13 186.8,42.275 190.025,45.5 192.35,45.5 195.575,48.725 195.575,64.5 192.85,67.225 v1(192.85,75.2) v1(192.85,78.5) v1(192.85,81.8) v1(192.85,85.1) v1(192.85,88.5) v1(192.85,93.1) v1(192.85,97.675)
  Bottom Layer w0.7: C81.1@191.815,81.9 191.915,81.8 v1(192.85,81.8) ; C82.2@191.875,75.225 191.9,75.2 v1(192.85,75.2)
  Bottom Layer w1: DA2.1@9.7,54.994 9.9,54.794 9.9,54.259 9.95,54.209 9.95,52.719 10.55,52.119 C2.2@10.75,52.119 ; C57A11.2@34.6,20.55 34.6,20.505 35.2,19.905 DA11A11.1@37.425,19.905 ; C57A12.2@66.375,20.55 66.375,20.505 66.975,19.905 DA11A12.1@69.2,19.905 ; C57A13.2@98.15,20.55 98.15,20.505 98.75,19.905 DA11A13.1@100.975,19.905 ; C57A14.2@129.925,20.55 129.925,20.505 130.525,19.905 DA11A14.1@132.75,19.905 ; C57A15.2@161.7,20.55 161.7,20.505 162.3,19.905 DA11A15.1@164.525,19.905 ; DA1.1@186.85,19.905 186.916,19.971 189.121,19.971 C1.2@189.7,20.55 189.7,25.15 C91.2@189.25,25.6 189.294,25.644 189.294,27.614 DA18.1@190.305,28.625 ; C1.2@189.7,20.505 C1.2@190.3,19.905 ; 191.5,78.5 v1(192.85,78.5)
GND_DRVA11: C59A11.2 C61A11.2 C63A11.1 C65A11.1 C66A11.2 C68A11.2 C69A11.2 C71A11.2 C72A11.2 DA11A11.7 DA12A11.2 DA13A11.5 DD5A11.9 DD5A11.15 R29A11.2 R34A11.1 R36A11.2 R37A11.2 U2A11.5 U3A11.3 U3A11.4 XP7A11.2 | length 24.6
  Top Layer w0.5: R37A11.2@18.465,14.85 R36A11.2@19.915,14.85
  Top Layer w1: 31.191,4.665 DA11A11.7@37.425,4.665
  GND Layer w1: 31.191,4.665 DA11A11.7@37.425,4.665
  Bottom Layer w0.3: DA12A11.2@12.14,5.025 12.14,5.1 12.14,6.65 C71A11.2@12.165,6.675 ; 12.165,4.3 DA12A11.2@12.165,5.025 ; DD5A11.15@12.465,10.4 12.465,8.575 C68A11.2@12.615,8.425
  Bottom Layer w1: 31.191,4.45 C59A11.2@34.6,4.45 ; C59A11.2@35.063,4.088 35.063,4.528 35.2,4.665 DA11A11.7@37.425,4.665
  other v1: 10.965,0.7 13.54,0.7 15.765,0.7 26.44,1.2 28.14,1.2 12.24,2 9.615,2.05 28.14,2.7 9.615,3.95 28.14,5.55 9.615,5.775 31.04,9.775 24.665,9.975 24.665,10.875 31.04,11.525 24.665,11.775 10.715,13.3 12.89,13.3 15.04,13.3 22.69,13.3 24.39,13.3 26.09,13.3 27.715,13.3 29.415,13.3 31.04,13.3
GND_DRVA12: C59A12.2 C61A12.2 C63A12.1 C65A12.1 C66A12.2 C68A12.2 C69A12.2 C71A12.2 C72A12.2 DA11A12.7 DA12A12.2 DA13A12.5 DD5A12.9 DD5A12.15 R29A12.2 R34A12.1 R36A12.2 R37A12.2 U2A12.5 U3A12.3 U3A12.4 XP7A12.2 | length 23.2
  Top Layer w0.5: R37A12.2@50.25,14.85 R36A12.2@51.7,14.85
  Top Layer w1: 63.215,4.665 DA11A12.7@69.2,4.665
  GND Layer w1: 63.215,4.665 DA11A12.7@69.2,4.665
  Bottom Layer w0.3: DA12A12.2@43.925,5.025 43.925,5.1 43.925,6.65 C71A12.2@43.95,6.675 ; DD5A12.15@44.25,10.4 44.25,8.575 C68A12.2@44.4,8.425
  Bottom Layer w1: 63.159,4.425 C59A12.2@66.375,4.425 ; C59A12.2@66.825,4.075 66.825,4.515 66.975,4.665 DA11A12.7@69.2,4.665
  other v1: 42.775,0.7 45.35,0.7 47.575,0.7 58.25,1.2 59.95,1.2 43.92,2.003 41.425,2.05 59.95,2.7 41.425,3.95 59.95,5.55 41.425,5.775 62.85,9.775 56.475,9.975 56.475,10.875 62.85,11.525 56.475,11.775 42.525,13.3 44.7,13.3 46.85,13.3 54.5,13.3 56.2,13.3 57.9,13.3 59.525,13.3 61.225,13.3 62.85,13.3
GND_DRVA13: C59A13.2 C61A13.2 C63A13.1 C65A13.1 C66A13.2 C68A13.2 C69A13.2 C71A13.2 C72A13.2 DA11A13.7 DA12A13.2 DA13A13.5 DD5A13.9 DD5A13.15 R29A13.2 R34A13.1 R36A13.2 R37A13.2 U2A13.5 U3A13.3 U3A13.4 XP7A13.2 | length 24.5
  Top Layer w0.5: R37A13.2@82.025,14.85 R36A13.2@83.475,14.85
  Top Layer w1: 94.54,4.665 DA11A13.7@100.975,4.665
  GND Layer w1: 94.54,4.665 DA11A13.7@100.975,4.665
  Bottom Layer w0.3: DA12A13.2@75.7,5.025 75.713,5.038 75.713,6.663 C71A13.2@75.725,6.675 ; DD5A13.15@76.025,10.4 76.1,10.325 76.1,8.5 C68A13.2@76.175,8.425
  Bottom Layer w1: 94.54,4.45 C59A13.2@98.15,4.45 ; C59A13.2@98.613,4.088 98.613,4.528 98.75,4.665 DA11A13.7@100.975,4.665
  other v1: 74.55,0.7 77.125,0.7 79.35,0.7 90.025,1.2 91.725,1.2 75.695,2.003 73.2,2.05 91.725,2.7 73.2,3.95 91.725,5.55 73.2,5.775 94.625,9.775 88.25,9.975 88.25,10.875 94.625,11.525 88.25,11.775 74.3,13.3 76.475,13.3 78.625,13.3 86.275,13.3 87.975,13.3 89.675,13.3 91.3,13.3 93,13.3 94.625,13.3
GND_DRVA14: C59A14.2 C61A14.2 C63A14.1 C65A14.1 C66A14.2 C68A14.2 C69A14.2 C71A14.2 C72A14.2 DA11A14.7 DA12A14.2 DA13A14.5 DD5A14.9 DD5A14.15 R29A14.2 R34A14.1 R36A14.2 R37A14.2 U2A14.5 U3A14.3 U3A14.4 XP7A14.2 | length 25
  Top Layer w0.5: R37A14.2@113.8,14.85 R36A14.2@115.25,14.85
  Top Layer w1: 126.16,4.665 DA11A14.7@132.75,4.665
  GND Layer w1: 126.16,4.665 DA11A14.7@132.75,4.665
  Bottom Layer w0.3: DA12A14.2@107.475,5.025 107.475,5.1 107.475,6.65 C71A14.2@107.5,6.675 ; DD5A14.15@107.8,10.4 107.8,8.575 C68A14.2@107.95,8.425
  Bottom Layer w1: 126.15,4.45 C59A14.2@129.925,4.45 ; C59A14.2@130.388,4.088 130.388,4.528 130.525,4.665 DA11A14.7@132.75,4.665
  other v1: 106.325,0.7 108.9,0.7 111.125,0.7 121.8,1.2 123.5,1.2 107.47,2.003 104.975,2.05 123.5,2.7 104.975,3.95 123.5,5.55 104.975,5.775 126.4,9.775 120.025,9.975 120.025,10.875 126.4,11.525 120.025,11.775 106.075,13.3 108.25,13.3 110.4,13.3 118.05,13.3 119.75,13.3 121.45,13.3 123.075,13.3 124.775,13.3 126.4,13.3
GND_DRVA15: C59A15.2 C61A15.2 C63A15.1 C65A15.1 C66A15.2 C68A15.2 C69A15.2 C71A15.2 C72A15.2 DA11A15.7 DA12A15.2 DA13A15.5 DD5A15.9 DD5A15.15 R29A15.2 R34A15.1 R36A15.2 R37A15.2 U2A15.5 U3A15.3 U3A15.4 XP7A15.2 | length 25.2
  Top Layer w0.5: R37A15.2@145.575,14.85 R36A15.2@147.025,14.85
  Top Layer w1: 157.865,4.665 DA11A15.7@164.525,4.665
  GND Layer w1: 157.865,4.665 DA11A15.7@164.525,4.665
  Bottom Layer w0.3: DA12A15.2@139.25,5.025 139.25,5.1 139.25,6.65 C71A15.2@139.275,6.675 ; DD5A15.15@139.575,10.4 139.575,8.575 C68A15.2@139.725,8.425
  Bottom Layer w1: 157.925,4.45 C59A15.2@161.7,4.45 161.915,4.665 DA11A15.7@164.525,4.665
  other v1: 138.1,0.7 142.9,0.7 153.575,1.2 155.275,1.2 139.245,2.003 136.75,2.05 155.275,2.7 136.75,3.95 155.275,5.55 136.75,5.775 158.175,9.775 151.8,9.975 151.8,10.875 158.175,11.525 151.8,11.775 137.85,13.3 140.025,13.3 142.175,13.3 149.825,13.3 151.525,13.3 153.225,13.3 154.85,13.3 156.55,13.3 158.175,13.3
GND_FS: C92.2 C93.2 C94.2 DA18.3 DD10.4 R63.2 XP13.3 | length 6.7
  Bottom Layer w1: 194.725,34.803 C94.2@194.725,30.775 195.125,30.775 195.225,30.675 195.225,29.068 195.308,28.984 195.308,28.702 DA18.3@195.385,28.625
GND_PSA6: C48A6.2 C49A6.2 C50A6.2 C51A6.1 C52A6.2 C53A6.2 C54A6.2 DA7A6.5 DA8A6.2 DD3A6.5 DD3A6.7 DD4A6.4 XP6A6.2
GND_PSA7: C48A7.2 C49A7.2 C50A7.2 C51A7.1 C52A7.2 C53A7.2 C54A7.2 DA7A7.5 DA8A7.2 DD3A7.5 DD3A7.7 DD4A7.4 XP6A7.2
GND_PSA8: C48A8.2 C49A8.2 C50A8.2 C51A8.1 C52A8.2 C53A8.2 C54A8.2 DA7A8.5 DA8A8.2 DD3A8.5 DD3A8.7 DD4A8.4 XP6A8.2
GND_PSA9: C48A9.2 C49A9.2 C50A9.2 C51A9.1 C52A9.2 C53A9.2 C54A9.2 DA7A9.5 DA8A9.2 DD3A9.5 DD3A9.7 DD4A9.4 XP6A9.2
GND_PSA10: C48A10.2 C49A10.2 C50A10.2 C51A10.1 C52A10.2 C53A10.2 C54A10.2 DA7A10.5 DA8A10.2 DD3A10.5 DD3A10.7 DD4A10.4 XP6A10.2 | length 14.5
  Top Layer w0.3: DD3A10.5@76.3,95.2 76.3,97.25 C50A10.2@76.5,97.45
  Bottom Layer w0.5: XP6A10.2@70.75,108.375 72.875,108.375 C54A10.2@73.15,108.65 73.675,108.125 C51A10.1@75.6,108.125 81.025,108.125 ; C53A10.2@78.9,104.225 78.9,105.725 DA8A10.2@78.9,105.8
  other v1: 64.05,97.375 69.7,98.4 64.05,99.125 69.7,99.475 64.05,100.875 69.7,101.65 64.05,102.625 69.7,102.925 64.05,104.375 69.7,104.4
GND_RS485: C100.1 C101.2 C102.2 C103.2 DD11.9 DD11.16 XP14.3 | length 7.8
  Top Layer w0.5: C102.2@6.725,38.069 C100.1@8.175,38.069 8.315,38.209 DD11.16@10.55,38.209 ; C103.2@6.725,47.219 C101.2@8.175,47.219 8.295,47.099 DD11.9@10.55,47.099
GUIDE_LAS: DD1.21 R41.1 | length 87.2
  Top Layer w0.3: v1(94.325,70.6) 94.325,70.519 94.425,70.419 DD1.21@94.425,69.3
  Top Layer w0.5: R41.1@171.796,89.65 171.798,89.648 171.798,88.777 v1(171.8,88.775)
  Bottom Layer w0.3: v1(94.325,70.6) 98.075,70.6 113.25,85.775 168.8,85.775 v1(171.8,88.775)
KEY: DD1.118 DD7.4 | length 79.1
  Top Layer w0.3: DD1.118@106.4,54.325 120.514,54.325 125.864,59.675 157.225,59.675 v1(170.3,72.75)
  Bottom Layer w0.3: v1(170.3,72.75) 176.55,72.75 176.9,73.1 176.9,73.45 177.025,73.575 DD7.4@177.35,73.575
LED1: DD1.53 R6.1 | length 3.8
  Top Layer w0.3: R6.1@81.725,60.725 82.475,60.725 83.875,59.325 DD1.53@84.95,59.325
LED2: DD1.54 R7.1 | length 3.2
  Top Layer w0.3: R7.1@81.725,58.825 DD1.54@84.95,58.825
LED3: DD1.55 R8.1 | length 3.8
  Top Layer w0.3: R8.1@81.725,56.925 82.475,56.925 83.875,58.325 DD1.55@84.95,58.325
LNKn: DD12.17 R74.2 | length 24.9
  Top Layer w0.3: DD12.17@170.075,60.951 170.075,63.05 168.275,64.85 168.275,69.125 170.6,71.45 176.675,71.45 178.675,69.45 178.675,66.95 178.963,66.662 R74.2@179.8,66.663
MEM_CS: DD1.132 DD2.1 | length 11.6
  Top Layer w0.3: DD1.132@106.4,61.325 107.494,61.325 107.619,61.2 v1(107.7,61.2) ; DD2.1@112.75,65.775 v1(114.375,65.775)
  Bottom Layer w0.3: v1(107.7,61.2) 109.8,61.2 v1(114.375,65.775) v1@114.4,65.775
MEM_MISO: DD1.134 DD2.2 | length 7.3
  Top Layer w0.3: DD1.134@106.4,62.325 109,62.325 111.2,64.525 DD2.2@112.75,64.525
MEM_MOSI: DD1.135 DD2.5 | length 17
  Top Layer w0.3: v1(104.9,62.825) 105.65,62.825 DD1.135@106.4,62.825 ; v1(117.125,61.975) DD2.5@118.75,61.975
  Bottom Layer w0.3: v1(104.9,62.825) 107.375,60.35 115.5,60.35 v1(117.125,61.975)
MEM_SCLK: DD1.133 DD2.6 | length 18.7
  Top Layer w0.3: DD1.133@106.4,61.825 108.85,61.825 110.325,60.35 119.85,60.35 120.475,60.975 120.475,62.838 120.088,63.225 DD2.6@118.75,63.225
NetC4_1: C4.1 DA2.4 L2.1 | length 4.5
  Bottom Layer w1: DA2.4@2.08,54.994 2.015,55.059 2.015,57.179 1.95,57.244 2.165,57.244 2.265,57.344 2.265,58.984 L2.1@2.4,59.119
NetC4_2: C4.2 DA2.3 R2.1 | length 4.5
  Bottom Layer w1: R2.1@4.3,59.119 4.435,58.984 4.435,57.344 4.535,57.244 4.75,57.244 4.685,57.179 4.685,55.059 DA2.3@4.62,54.994
NetC9_1: C9.1 DA4.5 | length 1.8
  Top Layer w0.5: DA4.5@177,5.8 178.025,5.8 178.125,5.7 178.525,5.7 C9.1@178.7,5.525
NetC9_2: C9.2 DA4.6 | length 1.8
  Top Layer w0.5: DA4.6@177,6.75 177.005,6.755 177.93,6.755 178.075,6.9 178.525,6.9 C9.2@178.7,7.075
NetC22_1: C22.1 DD1.71 | length 3.5
  Top Layer w0.3: C22.1@83.1,48.441 83.1,49.843 83.582,50.325 DD1.71@84.95,50.325
NetC31_1: C31.1 DD1.106 | length 4.4
  Top Layer w0.3: DD1.106@103.425,47.85 103.425,45.75 104.125,45.05 C31.1@105.431,45.05
NetC36_1: C36.1 DA5.1 R11.2 R11.3 | length 10.1
  Top Layer w0.5: DA5.1@30.95,98.8 32.95,98.8 33.243,98.507 33.918,98.507 34.25,98.175 R11.3@36.8,98.175 37.2,98.575 37.928,98.575 37.943,98.59 38.541,98.59 38.72,98.769 39.619,98.769 R11.2@40.25,99.4
NetC42_1: C42.1 DA6.1 R17.2 | length 3
  Top Layer w0.5: DA6.1@21.45,99.05 21.463,99.037 22.913,99.037 C42.1@22.925,99.025 22.95,99.05 22.95,100.45 R17.2@22.975,100.475
NetC50A6_1: C50A6.1 DA7A6.3 R22A6.2
NetC50A7_1: C50A7.1 DA7A7.3 R22A7.2
NetC50A8_1: C50A8.1 DA7A8.3 R22A8.2
NetC50A9_1: C50A9.1 DA7A9.3 R22A9.2
NetC50A10_1: C50A10.1 DA7A10.3 R22A10.2 | length 3.2
  Top Layer w0.3: R22A10.2@75.05,99 C50A10.1@76.5,99 ; R22A10.2@75.075,99 DA7A10.3@75.075,100.775
NetC55A11_1: C55A11.1 DA10A11.3 R25A11.2 | length 3.2
  Bottom Layer w0.5: C55A11.1@23.025,33.725 R25A11.2@24.375,33.725 ; DA10A11.3@23.725,32.275 24.05,32.275 24.075,32.3 24.075,32.625 24.275,32.825 24.275,33.475 R25A11.2@24.45,33.65
NetC55A12_1: C55A12.1 DA10A12.3 R25A12.2 | length 3.2
  Bottom Layer w0.5: R25A12.2@54.875,33.65 C55A12.1@56.225,33.65 56.05,33.475 56.05,32.825 55.85,32.625 55.85,32.3 55.825,32.275 DA10A12.3@55.5,32.275
NetC55A13_1: C55A13.1 DA10A13.3 R25A13.2 | length 3.2
  Bottom Layer w0.3: C55A13.1@86.675,33.575 C55A13.1@86.687,33.587
  Bottom Layer w0.5: C55A13.1@86.675,33.575 R25A13.2@88.025,33.575 87.85,33.4 87.85,32.975 87.65,32.775 87.65,32.3 87.625,32.275 DA10A13.3@87.3,32.275
NetC55A14_1: C55A14.1 DA10A14.3 R25A14.2 | length 3.1
  Bottom Layer w0.5: R25A14.2@118.45,33.575 C55A14.1@119.8,33.575 ; DA10A14.3@119.05,32.275 119.375,32.275 119.4,32.3 119.4,32.625 119.625,32.85 119.625,33.35 C55A14.1@119.8,33.525
NetC55A15_1: C55A15.1 DA10A15.3 R25A15.2 | length 3.1
  Bottom Layer w0.5: R25A15.2@150.15,33.575 C55A15.1@151.5,33.575 151.332,33.407 151.332,32.782 151.175,32.625 151.175,32.3 151.15,32.275 DA10A15.3@150.825,32.275
NetC62A11_2: C62A11.2 R26A11.1 R28A11.1 U2A11.2 | length 6.9
  Top Layer w0.5: R26A11.1@25.824,25.637 27.274,25.637 28.724,25.637 28.815,25.547 U2A11.2@28.815,21.675
NetC62A12_2: C62A12.2 R26A12.1 R28A12.1 U2A12.2 | length 6.9
  Top Layer w0.5: R26A12.1@57.65,25.65 60.575,25.65 60.625,25.6 U2A12.2@60.625,21.675
NetC62A13_2: C62A13.2 R26A13.1 R28A13.1 U2A13.2 | length 6.9
  Top Layer w0.5: R26A13.1@89.425,25.65 92.35,25.65 92.4,25.6 U2A13.2@92.4,21.675
NetC62A14_2: C62A14.2 R26A14.1 R28A14.1 U2A14.2 | length 6.9
  Top Layer w0.5: R26A14.1@121.2,25.65 124.125,25.65 124.175,25.6 U2A14.2@124.175,21.675
NetC62A15_2: C62A15.2 R26A15.1 R28A15.1 U2A15.2 | length 6.9
  Top Layer w0.5: R26A15.1@152.975,25.65 155.9,25.65 155.95,25.6 U2A15.2@155.95,21.675
NetC63A11_2: C63A11.2 R27A11.1 R29A11.1 U3A11.2 | length 5.5
  Top Layer w0.5: U3A11.2@12.465,11.1 12.465,8.475 13.915,8.475 R27A11.1@15.365,8.475
NetC63A12_2: C63A12.2 R27A12.1 R29A12.1 U3A12.2 | length 5.5
  Top Layer w0.5: U3A12.2@44.25,11.1 44.25,8.475 45.7,8.475 R27A12.1@47.15,8.475
NetC63A13_2: C63A13.2 R27A13.1 R29A13.1 U3A13.2 | length 5.5
  Top Layer w0.5: U3A13.2@76.025,11.1 76.025,8.475 77.475,8.475 R27A13.1@78.925,8.475
NetC63A14_2: C63A14.2 R27A14.1 R29A14.1 U3A14.2 | length 5.5
  Top Layer w0.5: U3A14.2@107.8,11.1 107.8,8.475 109.25,8.475 R27A14.1@110.7,8.475
NetC63A15_2: C63A15.2 R27A15.1 R29A15.1 U3A15.2 | length 5.5
  Top Layer w0.5: U3A15.2@139.575,11.1 139.575,8.475 141.025,8.475 R27A15.1@142.475,8.475
NetC69A11_1: C69A11.1 DA13A11.3 R30A11.2 R34A11.2 | length 5.3
  Top Layer w0.5: R30A11.2@18.39,10.575 18.415,10.55 18.415,8.5 18.44,8.475 19.89,8.475 21.29,8.475 21.315,8.5 DA13A11.3@21.315,8.76
NetC69A12_1: C69A12.1 DA13A12.3 R30A12.2 R34A12.2 | length 5.2
  Top Layer w0.5: R30A12.2@50.2,10.575 50.25,10.525 C69A12.1@50.25,8.475 51.7,8.475 53,8.475 53.125,8.6 DA13A12.3@53.125,8.76
NetC69A13_1: C69A13.1 DA13A13.3 R30A13.2 R34A13.2 | length 5.2
  Top Layer w0.5: R30A13.2@81.975,10.575 82.025,10.525 C69A13.1@82.025,8.475 R34A13.2@83.475,8.475 84.775,8.475 84.9,8.6 DA13A13.3@84.9,8.76
NetC69A14_1: C69A14.1 DA13A14.3 R30A14.2 R34A14.2 | length 5.2
  Top Layer w0.5: R30A14.2@113.75,10.575 113.8,10.525 C69A14.1@113.8,8.475 R34A14.2@115.25,8.475 116.55,8.475 116.675,8.6 DA13A14.3@116.675,8.76
NetC69A15_1: C69A15.1 DA13A15.3 R30A15.2 R34A15.2 | length 5.2
  Top Layer w0.5: R30A15.2@145.525,10.575 145.575,10.525 C69A15.1@145.575,8.475 R34A15.2@147.025,8.475 148.325,8.475 148.45,8.6 DA13A15.3@148.45,8.76
NetC70A11_1: C70A11.1 DA14A11.3 R31A11.2 R35A11.1 | length 5.2
  Top Layer w0.5: DA14A11.3@19.99,25.325 19.99,25.525 20.115,25.65 21.415,25.65 22.865,25.65 22.915,25.6 R31A11.2@22.915,23.55
NetC70A12_1: C70A12.1 DA14A12.3 R31A12.2 R35A12.1 | length 5.2
  Top Layer w0.5: DA14A12.3@51.75,25.325 51.75,25.525 51.875,25.65 R35A12.1@53.175,25.65 C70A12.1@54.625,25.65 54.675,25.6 R31A12.2@54.675,23.55
NetC70A13_1: C70A13.1 DA14A13.3 R31A13.2 R35A13.1 | length 5.2
  Top Layer w0.5: DA14A13.3@83.525,25.325 83.525,25.525 83.65,25.65 R35A13.1@84.95,25.65 C70A13.1@86.4,25.65 86.45,25.6 R31A13.2@86.45,23.55
NetC70A14_1: C70A14.1 DA14A14.3 R31A14.2 R35A14.1 | length 5.2
  Top Layer w0.5: DA14A14.3@115.3,25.325 115.3,25.525 115.425,25.65 R35A14.1@116.725,25.65 C70A14.1@118.175,25.65 118.225,25.6 R31A14.2@118.225,23.55
NetC70A15_1: C70A15.1 DA14A15.3 R31A15.2 R35A15.1 | length 5.2
  Top Layer w0.5: DA14A15.3@147.075,25.325 147.075,25.525 147.2,25.65 R35A15.1@148.5,25.65 C70A15.1@149.95,25.65 150,25.6 R31A15.2@150,23.55
NetC74A11_1: C74A11.1 DA13A11.4 R32A11.2 R38A11.1 | length 7.2
  Top Layer w0.3: DA13A11.4@21.315,6.61 21.315,6.935 21.44,7.06 21.65,7.06 22.29,7.7 23.634,7.7 24.109,7.225 24.365,7.225 R38A11.1@24.64,6.95
  Top Layer w0.5: R38A11.1@24.64,6.95 26.09,6.95 R32A11.2@27.54,6.95
NetC74A11_2: C74A11.2 DA13A11.1 R38A11.2 XP7A11.5 | length 15.4
  Top Layer w0.3: XP7A11.5@21.665,3.625 22.665,2.625 v3(26.09,2.625)
  Top Layer w0.5: DA13A11.1@23.215,8.76 23.215,8.625 23.34,8.5 24.64,8.5 26.09,8.5 v1(26.09,9.3)
  Bottom Layer w0.5: v3(26.09,2.625) v1(26.09,9.3)
NetC74A12_1: C74A12.1 DA13A12.4 R32A12.2 R38A12.1 | length 7.2
  Top Layer w0.3: DA13A12.4@53.125,6.61 53.125,6.935 53.25,7.06 53.575,7.06 54.205,7.69 55.446,7.69 55.936,7.2 56.175,7.2 R38A12.1@56.45,6.925
  Top Layer w0.5: R38A12.1@56.45,6.925 C74A12.1@57.9,6.925 R32A12.2@59.35,6.925
NetC74A12_2: C74A12.2 DA13A12.1 R38A12.2 XP7A12.5 | length 15.5
  Top Layer w0.3: XP7A12.5@53.45,3.625 54.475,2.6 v1(57.9,2.6)
  Top Layer w0.5: DA13A12.1@55.025,8.76 55.025,8.6 55.15,8.475 R38A12.2@56.45,8.475 C74A12.2@57.9,8.475 v1(57.9,9.3)
  Bottom Layer w0.5: v1(57.9,2.6) v1(57.9,9.3)
NetC74A13_1: C74A13.1 DA13A13.4 R32A13.2 R38A13.1 | length 7.2
  Top Layer w0.3: DA13A13.4@84.9,6.61 84.9,6.935 85.025,7.06 85.35,7.06 85.98,7.69 87.221,7.69 87.711,7.2 87.95,7.2 R38A13.1@88.225,6.925
  Top Layer w0.5: R38A13.1@88.225,6.925 C74A13.1@89.675,6.925 R32A13.2@91.125,6.925
NetC74A13_2: C74A13.2 DA13A13.1 R38A13.2 XP7A13.5 | length 15.5
  Top Layer w0.3: XP7A13.5@85.225,3.625 86.25,2.6 v1(89.675,2.6)
  Top Layer w0.5: DA13A13.1@86.8,8.76 86.8,8.6 86.925,8.475 R38A13.2@88.225,8.475 C74A13.2@89.675,8.475 v1(89.675,9.3)
  Bottom Layer w0.5: v1(89.675,2.6) v1(89.675,9.3)
NetC74A14_1: C74A14.1 DA13A14.4 R32A14.2 R38A14.1 | length 7.2
  Top Layer w0.3: DA13A14.4@116.675,6.61 116.675,6.935 116.8,7.06 117.125,7.06 117.755,7.69 118.996,7.69 119.486,7.2 119.725,7.2 R38A14.1@120,6.925
  Top Layer w0.5: R38A14.1@120,6.925 C74A14.1@121.45,6.925 R32A14.2@122.9,6.925
NetC74A14_2: C74A14.2 DA13A14.1 R38A14.2 XP7A14.5 | length 15.5
  Top Layer w0.3: XP7A14.5@117,3.625 118.025,2.6 v1(121.45,2.6)
  Top Layer w0.5: DA13A14.1@118.575,8.76 118.575,8.6 118.7,8.475 R38A14.2@120,8.475 C74A14.2@121.45,8.475 v1(121.45,9.3)
  Bottom Layer w0.5: v1(121.45,2.6) v1(121.45,9.3)
NetC74A15_1: C74A15.1 DA13A15.4 R32A15.2 R38A15.1 | length 7.2
  Top Layer w0.3: DA13A15.4@148.45,6.61 148.45,6.935 148.575,7.06 148.9,7.06 149.53,7.69 150.771,7.69 151.261,7.2 151.5,7.2 R38A15.1@151.775,6.925
  Top Layer w0.5: R38A15.1@151.775,6.925 C74A15.1@153.225,6.925 R32A15.2@154.675,6.925
NetC74A15_2: C74A15.2 DA13A15.1 R38A15.2 XP7A15.5 | length 15.5
  Top Layer w0.3: XP7A15.5@148.775,3.625 149.8,2.6 v1(153.225,2.6)
  Top Layer w0.5: DA13A15.1@150.35,8.76 150.35,8.6 150.475,8.475 R38A15.2@151.775,8.475 C74A15.2@153.225,8.475 v1(153.225,9.3)
  Bottom Layer w0.5: v1(153.225,2.6) v1(153.225,9.3)
NetC75A11_1: C75A11.1 DA14A11.4 R33A11.2 R39A11.2 | length 7.2
  Top Layer w0.3: R39A11.2@16.631,27.2 16.681,27.2 17.481,26.4 19,26.4 19.625,27.025 19.84,27.025 19.965,27.15 DA14A11.4@19.965,27.475
  Top Layer w0.5: R33A11.2@13.731,27.2 C75A11.1@15.181,27.2 R39A11.2@16.631,27.2
NetC75A11_2: C75A11.2 DA14A11.1 R39A11.1 R40A11.1 | length 9.2
  Top Layer w0.3: 15.9,25.569 15.981,25.65
  Top Layer w0.5: C75A11.2@15.181,25.65 15.981,25.65 R39A11.1@16.631,25.65 17.94,25.65 18.065,25.525 DA14A11.1@18.065,25.325 ; v1(15.6,28.55) R40A11.1@16.625,28.55
  Top Layer w0.6: v1(15.6,24.675) 15.9,24.975 15.9,25.569
  Bottom Layer w0.6: v1(15.6,24.675) v1(15.6,28.55)
NetC75A12_1: C75A12.1 DA14A12.4 R33A12.2 R39A12.2 | length 7.2
  Top Layer w0.3: R39A12.2@48.416,27.2 48.466,27.2 49.266,26.4 50.789,26.4 51.414,27.025 51.625,27.025 51.75,27.15 DA14A12.4@51.75,27.475
  Top Layer w0.5: R33A12.2@45.516,27.2 C75A12.1@46.966,27.2 R39A12.2@48.416,27.2
NetC75A12_2: C75A12.2 DA14A12.1 R39A12.1 R40A12.1 | length 9.1
  Top Layer w0.5: C75A12.2@46.966,25.65 47.686,25.65 R39A12.1@48.416,25.65 49.725,25.65 49.85,25.525 DA14A12.1@49.85,25.325 ; v1(47.4,24.675) v1@47.4,24.702 ; v1(47.4,28.55) R40A12.1@48.425,28.55
  Top Layer w0.6: v1@47.4,24.702 47.686,24.989 47.686,25.65
  Bottom Layer w0.5: v1(47.4,24.675) v1(47.4,28.55)
NetC75A13_1: C75A13.1 DA14A13.4 R33A13.2 R39A13.2 | length 7.2
  Top Layer w0.3: R39A13.2@80.191,27.2 80.241,27.2 81.041,26.4 82.55,26.4 83.175,27.025 83.4,27.025 83.525,27.15 DA14A13.4@83.525,27.475
  Top Layer w0.5: R33A13.2@77.291,27.2 78.741,27.2 R39A13.2@80.191,27.2
NetC75A13_2: C75A13.2 DA14A13.1 R39A13.1 R40A13.1 | length 9.1
  Top Layer w0.5: C75A13.2@78.741,25.65 79.47,25.65 81.5,25.65 81.625,25.525 DA14A13.1@81.625,25.325 ; v1(79.175,28.55) R40A13.1@80.2,28.55
  Top Layer w0.6: v1(79.175,24.675) 79.47,24.97 79.47,25.65
  Bottom Layer w0.3: v1(79.175,24.675) v1(79.175,28.55)
NetC75A14_1: C75A14.1 DA14A14.4 R33A14.2 R39A14.2 | length 7.2
  Top Layer w0.3: R39A14.2@112.016,27.2 112.816,26.4 114.325,26.4 114.95,27.025 115.175,27.025 115.3,27.15 DA14A14.4@115.3,27.475
  Top Layer w0.5: R33A14.2@109.075,27.2 R39A14.2@111.975,27.2
NetC75A14_2: C75A14.2 DA14A14.1 R39A14.1 R40A14.1 | length 9.2
  Top Layer w0.5: C75A14.2@110.516,25.65 111.242,25.65 113.275,25.65 113.4,25.525 DA14A14.1@113.4,25.325 ; v1(110.95,28.55) R40A14.1@111.975,28.55
  Top Layer w0.6: v1(110.95,24.675) 111.242,24.967 111.242,25.65 111.242,25.675
  GND Layer w0.5: v1(110.95,24.675) v1(110.95,28.55)
NetC75A15_1: C75A15.1 DA14A15.4 R33A15.2 R39A15.2 | length 7.2
  Top Layer w0.3: R39A15.2@143.741,27.2 143.791,27.2 144.591,26.4 146.1,26.4 146.725,27.025 146.95,27.025 147.075,27.15 DA14A15.4@147.075,27.475
  Top Layer w0.5: R33A15.2@140.841,27.2 142.291,27.2 R39A15.2@143.741,27.2
NetC75A15_2: C75A15.2 DA14A15.1 R39A15.1 R40A15.1 | length 9.1
  Top Layer w0.5: C75A15.2@142.291,25.65 143.018,25.65 145.05,25.65 145.175,25.525 DA14A15.1@145.175,25.325 ; v1(142.725,28.55) R40A15.1@143.75,28.55
  Top Layer w0.6: v1(142.725,24.669) 143.018,24.961 143.018,25.65
  Bottom Layer w0.5: v1(142.725,24.669) v1(142.725,28.55)
NetC77_1: C77.1 DA15.3 R41.2 | length 3.1
  Top Layer w0.3: DA15.3@173.009,91.087 173.246,91.087 173.371,90.962 173.371,89.65 C77.1@174.721,89.65
NetC80_1: C80.1 DA16.1 R44.1 | length 3.5
  Top Layer w0.5: R44.1@170.925,99.243 R44.1@170.946,99.243 C80.1@172.925,99.243 172.996,99.172 DA16.1@172.996,97.8
NetC80_2: C80.2 DA16.4 R45.1 | length 6.1
  Top Layer w0.3: C80.2@174.475,99.243 174.2,98.968 174.2,98.553 174.065,98.417 174.065,97.131 174.695,96.5 174.695,96.093 174.696,95.918 174.821,95.793 DA16.4@175.146,95.793
  Top Layer w0.5: C80.2@174.475,99.243 R45.1@176.325,99.243
NetC83_1: C83.1 DD6.2 R54.2 R57.1 | length 6.3
  Bottom Layer w0.3: DD6.2@179.5,69.275 179.524,69.299 180.374,69.299 180.85,69.775 181.25,69.775 181.5,70.025 C83.1@181.5,70.05 ; R54.2@180.075,71.725 180.35,71.45 180.35,71.1 180.59,70.86 181.074,70.86 181.25,70.684 181.25,70.325 181.525,70.05 C83.1@181.575,70.05
  Bottom Layer w0.5: R57.1@178.7,71.725 R54.2@180.075,71.725
NetC84_1: C84.1 DD7.2 R55.2 R58.1 | length 6.4
  Bottom Layer w0.3: DD7.2@179.5,74.525 180.375,74.525 180.875,75.025 181.3,75.025 C84.1@181.575,75.3 181.525,75.3 181.25,75.575 181.25,75.899 181.038,76.112 180.563,76.112 180.35,76.325 180.35,76.7 R55.2@180.075,76.975
  Bottom Layer w0.5: R58.1@178.7,76.975 R55.2@180.075,76.975
NetC85_1: C85.1 DD8.2 R56.2 R59.1 | length 6.4
  Bottom Layer w0.3: DD8.2@179.5,79.775 180.375,79.775 180.875,80.275 181.3,80.275 C85.1@181.575,80.55 181.525,80.55 181.25,80.825 181.25,81.199 181.074,81.375 180.526,81.375 180.35,81.551 180.35,81.95 R56.2@180.075,82.225
  Bottom Layer w0.5: R59.1@178.7,82.225 R56.2@180.075,82.225
NetC89_1: C89.1 DD9.2 R61.2 R62.1 | length 6.3
  Bottom Layer w0.3: DD9.2@179.5,85.025 179.524,85.049 180.374,85.049 180.85,85.525 181.25,85.525 181.5,85.775 C89.1@181.5,85.8 ; R61.2@180.075,87.475 180.35,87.2 180.35,86.85 180.59,86.61 181.074,86.61 181.25,86.434 181.25,86.075 181.525,85.8 C89.1@181.575,85.8
  Bottom Layer w0.5: R62.1@178.7,87.475 R61.2@180.075,87.475